# Altium PCB EMIA_HM1521_NETLIST.pcbdoc (part 1 of 2)
Units mm, origin at the board's own origin, x right, y up, seen from the top; angles counter-clockwise.
Board outline 118 x 84.09 mm, 2 copper layers (Top Layer, Bottom Layer), stack 0.972 mm thick; 201 components, 147 nets, 642 pads, 379 vias.
Unrouted connection lines stored in the file: 1.
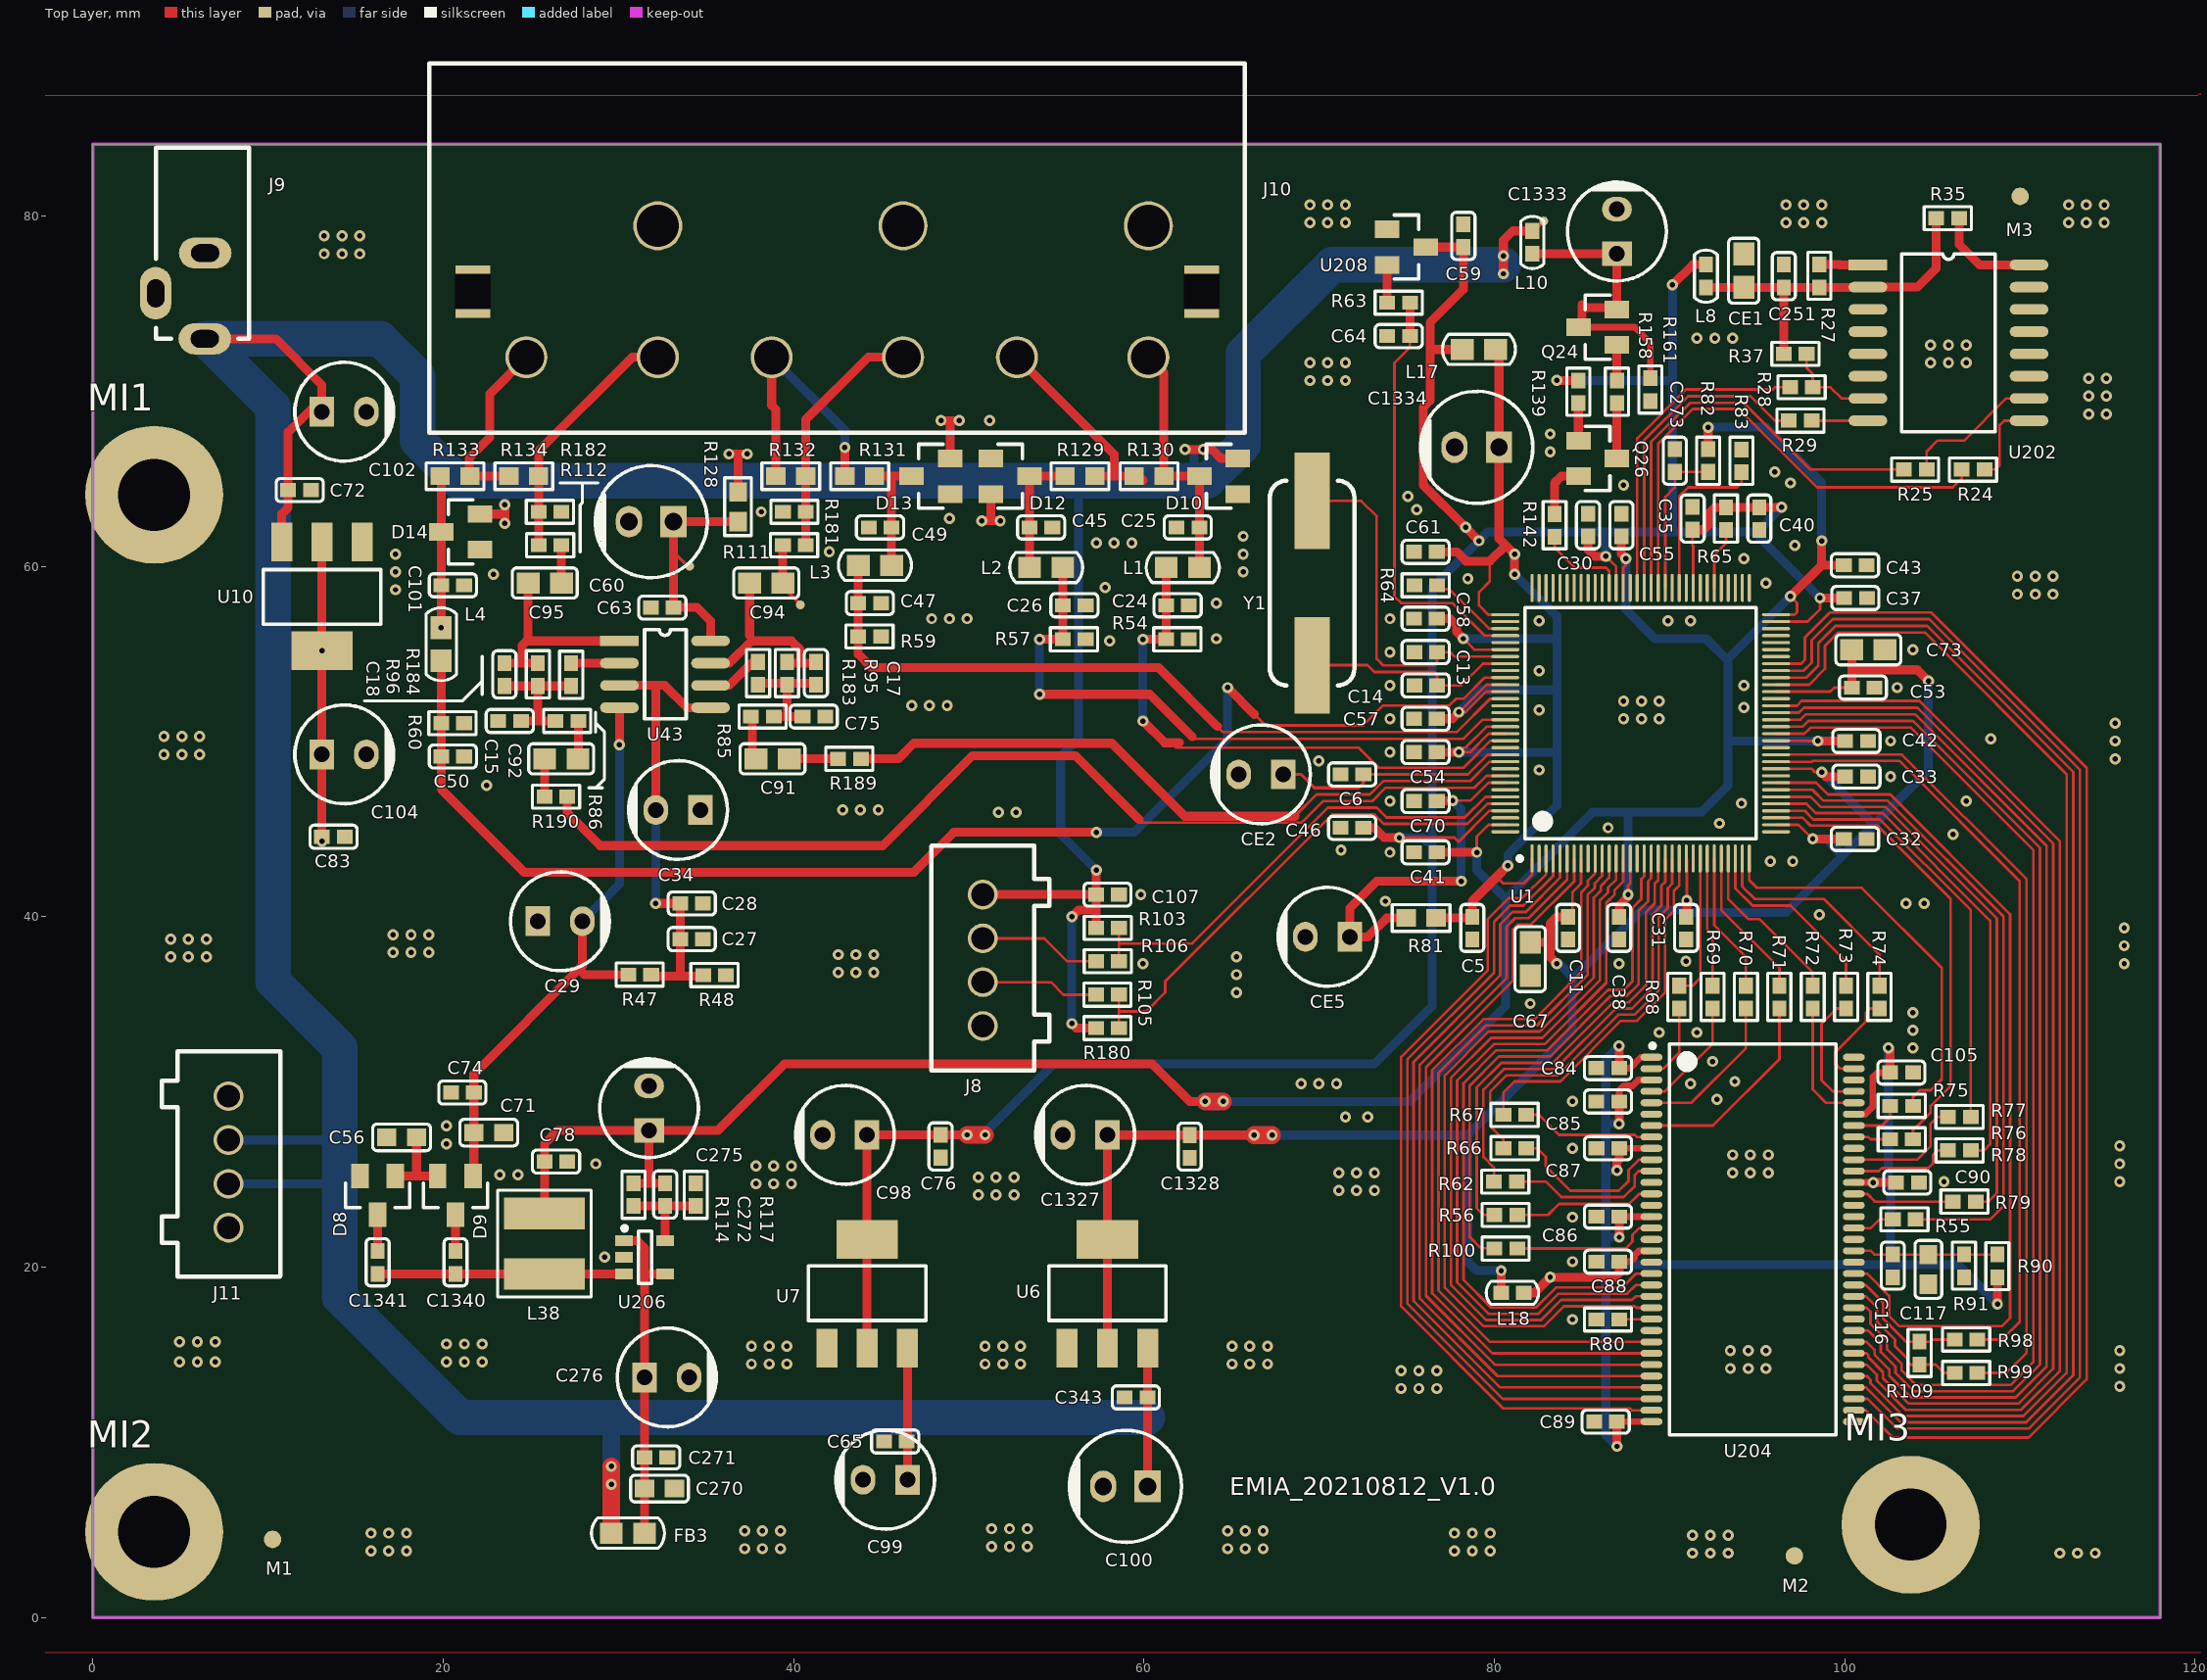
[diagram p0: Top Layer view]
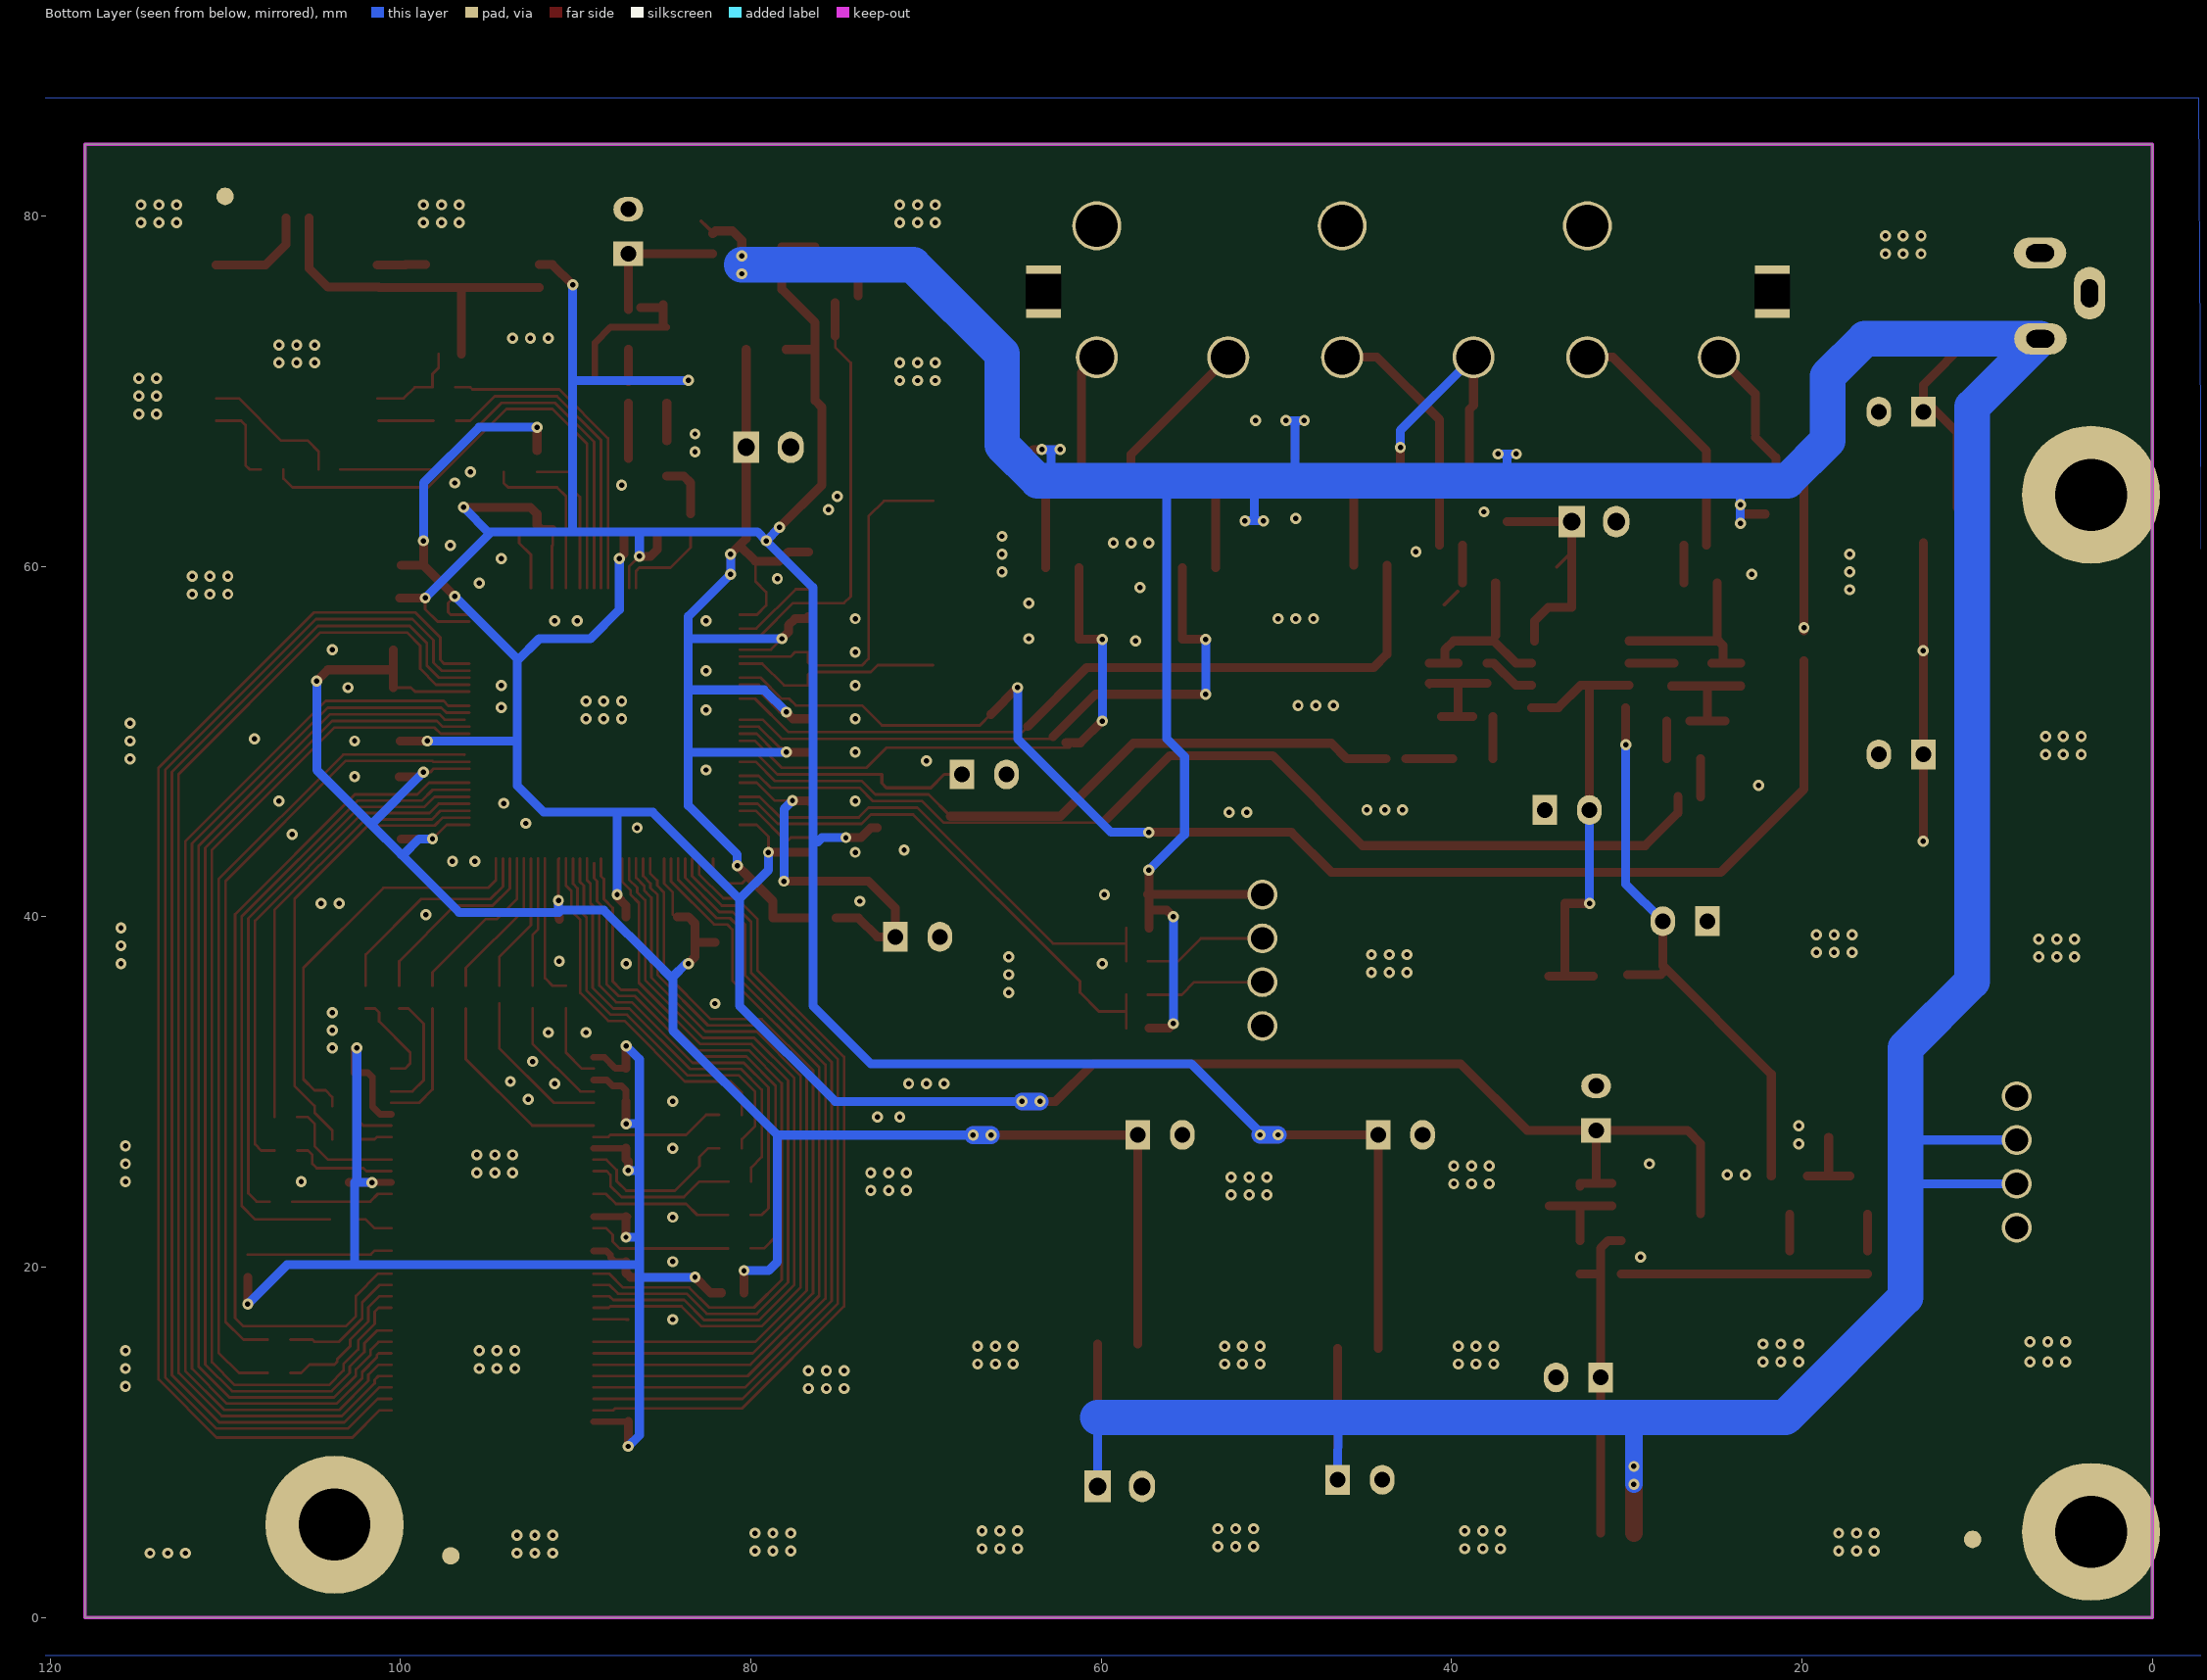
[diagram p1: Bottom Layer view, seen from below]

## Layer stack, top to bottom
Top Solder: solder mask 0.0102, Solder Resist, Dk 3.5
Top Layer: signal copper 0.0356
Dielectric 1: dielectric 0.9004, FR-4, Dk 4.8
Bottom Layer: signal copper 0.0356
Bottom Solder: solder mask 0.0102, Solder Resist, Dk 3.5

## Board outline
0,0 0,84.094 118,84.094 118,0

## Design rules (kind name [scope] priority, off if disabled: settings)
AssemblyTestPointUsage [All] p0 off: scope1count=1 scope1_0_kind=Board scope1_0_value=Board scope2count=1 scope2_0_kind=Board scope2_0_value=Board commentlength=0
AssemblyTestPointUsage [All] p1 off:
AssemblyTestpoint [All] p0 off: scope1count=1 scope1_0_kind=Board scope1_0_value=Board scope2count=1 scope2_0_kind=Board scope2_0_value=Board commentlength=0
AssemblyTestpoint [All] p1 off: testpointundercomponent=TRUE minsize=1.016 maxsize=2.54 preferedsize=1.524 minholesize=0 maxholesize=1.016 preferedholesize=0.813 testpointgrid=0.025 usegrid=TRUE gridtolerance=0 allowsidetop=TRUE allowsidebottom=TRUE
Clearance Clearance_1 [All] p0: scope1count=1 scope1_0_kind=Board scope1_0_value=Board scope2count=1 scope2_0_kind=Board scope2_0_value=Board commentlength=0 gap=0.254
Clearance [All] p0 off: scope1count=1 scope1_0_kind=Board scope1_0_value=Board scope2count=1 scope2_0_kind=Board scope2_0_value=Board commentlength=48 gap=0.203 // Protel DXP Scope 1 Expression Was: InPolygon
Clearance Clearance_1 [All] p1: gap=0.254 ignorepadtopadclearanceinfootprint=FALSE except(0: Arc-Hole Track-Hole SMDPad-Hole THPad-Hole Via-Hole Fill-Hole Poly-Hole Region-Hole Text-Hole; 0.203: Arc-Arc Arc-Track Arc-SMDPad Arc-Via Arc-Fill Arc-Poly Arc-Region Track-Track Track-SMDPad Track-Via Track-Fill Track-Poly Track-Region SMDPad-SMDPad SMDPad-Fill SMDPad-Poly SMDPad-Region)
Clearance [InPolygon] p2 off: gap=0.203 ignorepadtopadclearanceinfootprint=FALSE
ComponentClearance [All] p0 off: scope1count=1 scope1_0_kind=Board scope1_0_value=Board scope2count=1 scope2_0_kind=Board scope2_0_value=Board commentlength=0 gap=0.254 collisioncheckmode=3
ComponentClearance [All] p1 off: gap=0.254 collisioncheckmode=3 verticalgap=0.254 showdistances=FALSE
DiffPairsRouting [All] p0 off: scope1count=1 scope1_0_kind=Board scope1_0_value=Board scope2count=1 scope2_0_kind=Board scope2_0_value=Board commentlength=0
DiffPairsRouting [All] p1 off: maxlimit=0.381 minlimit=0.025 mostfreqgap=0.025 toplayer_minwidth=0.025 toplayer_maxwidth=0.381 toplayer_prefwidth=0.025 bottomlayer_minwidth=0.025 bottomlayer_maxwidth=0.381 bottomlayer_prefwidth=0.025 maxuncoupledlength=12.7
FabricationTestPointUsage [All] p0 off: scope1count=1 scope1_0_kind=Board scope1_0_value=Board scope2count=1 scope2_0_kind=Board scope2_0_value=Board commentlength=0 valid=0 allowmultiple=FALSE
FabricationTestPointUsage [All] p1 off: valid=0 allowmultiple=FALSE
FabricationTestpoint [All] p0 off: scope1count=1 scope1_0_kind=Board scope1_0_value=Board scope2count=1 scope2_0_kind=Board scope2_0_value=Board commentlength=0 side=3 testpointundercomponent=TRUE minsize=1.016 maxsize=2.54 preferedsize=1.524 minholesize=0 maxholesize=1.016 preferedholesize=0.813 testpointgrid=0.025
FabricationTestpoint [All] p1 off: side=3 testpointundercomponent=TRUE minsize=1.016 maxsize=2.54 preferedsize=1.524 minholesize=0 maxholesize=1.016 preferedholesize=0.813 testpointgrid=0.025 allowsidetop=TRUE allowsidebottom=TRUE usegrid=TRUE gridtolerance=0
FanoutControl Fanout_BGA [All] p0 off: scope1count=1 scope1_0_kind=Board scope1_0_value=Board scope2count=1 scope2_0_kind=Board scope2_0_value=Board commentlength=69 // Protel DXP Scope 1 Expression Was: IsBGA   Fanout_BGA (Default Rule)
FanoutControl Fanout_LCC [All] p0 off: scope1count=1 scope1_0_kind=Board scope1_0_value=Board scope2count=1 scope2_0_kind=Board scope2_0_value=Board commentlength=69 // Protel DXP Scope 1 Expression Was: IsLCC   Fanout_LCC (Default Rule)
FanoutControl Fanout_SOIC [All] p0 off: scope1count=1 scope1_0_kind=Board scope1_0_value=Board scope2count=1 scope2_0_kind=Board scope2_0_value=Board commentlength=71 // Protel DXP Scope 1 Expression Was: IsSOIC   Fanout_SOIC (Default Rule)
FanoutControl Fanout_Small [All] p0 off: scope1count=1 scope1_0_kind=Board scope1_0_value=Board scope2count=1 scope2_0_kind=Board scope2_0_value=Board commentlength=84 // Protel DXP Scope 1 Expression Was: (CompPinCount < 5)   Fanout_Small (Default Rule)
FanoutControl Fanout_Default [All] p0 off: scope1count=1 scope1_0_kind=Board scope1_0_value=Board scope2count=1 scope2_0_kind=Board scope2_0_value=Board commentlength=30 // Fanout_Default (Default Rule)
FanoutControl Fanout_BGA [IsBGA] p1 off: bgadir=Out bgaviamode=Centered fanoutstyle=Auto fanoutdirection=Alternating viagrid=0.025 // Fanout_BGA (Default Rule)
FanoutControl Fanout_LCC [IsLCC] p2 off: bgadir=Out bgaviamode=Centered fanoutstyle=Auto fanoutdirection=Alternating viagrid=0.025 // Fanout_LCC (Default Rule)
FanoutControl Fanout_SOIC [IsSOIC] p3 off: bgadir=Out bgaviamode=Centered fanoutstyle=Auto fanoutdirection=Alternating viagrid=0.025 // Fanout_SOIC (Default Rule)
FanoutControl Fanout_Small [(CompPinCount < 5)] p4 off: bgadir=Out bgaviamode=Centered fanoutstyle=Auto fanoutdirection=OutThenIn viagrid=0.025 // Fanout_Small (Default Rule)
FanoutControl Fanout_Default [All] p5 off: bgadir=Out bgaviamode=Centered fanoutstyle=Auto fanoutdirection=Alternating viagrid=0.025 // Fanout_Default (Default Rule)
Height [All] p0 off: scope1count=1 scope1_0_kind=Board scope1_0_value=Board scope2count=1 scope2_0_kind=Board scope2_0_value=Board commentlength=0
Height [All] p1 off: minheight=0 maxheight=25.4 prefheight=12.7
HoleSize [All] p0 off: scope1count=1 scope1_0_kind=Board scope1_0_value=Board scope2count=1 scope2_0_kind=Board scope2_0_value=Board commentlength=0 absolutevalues=TRUE maxlimit=5.08 minlimit=0.254 maxpercent=80.000 minpercent=20.000
HoleSize [All] p1 off: absolutevalues=TRUE maxlimit=5.08 minlimit=0.254 maxpercent=80.000 minpercent=20.000
HoleToHoleClearance [All] p0 off: scope1count=1 scope1_0_kind=Board scope1_0_value=Board scope2count=1 scope2_0_kind=Board scope2_0_value=Board commentlength=0
HoleToHoleClearance [All] p1 off: gap=0.254 allowstackedmicrovias=TRUE
LayerPairs [All] p0 off: scope1count=1 scope1_0_kind=Board scope1_0_value=Board scope2count=1 scope2_0_kind=Board scope2_0_value=Board commentlength=0 enforce=TRUE
LayerPairs [All] p1 off: enforce=TRUE
MinimumSolderMaskSliver [All] p0 off: scope1count=1 scope1_0_kind=Board scope1_0_value=Board scope2count=1 scope2_0_kind=Board scope2_0_value=Board commentlength=0
MinimumSolderMaskSliver [All] p1 off: minsoldermaskwidth=0.013
NetAntennae [All] p0 off: scope1count=1 scope1_0_kind=Board scope1_0_value=Board scope2count=1 scope2_0_kind=Board scope2_0_value=Board commentlength=0
NetAntennae [All] p1 off: netantennaetolerance=0
PasteMaskExpansion [All] p0 off: scope1count=1 scope1_0_kind=Board scope1_0_value=Board scope2count=1 scope2_0_kind=Board scope2_0_value=Board commentlength=0 expansion=0
PasteMaskExpansion [All] p1 off: expansion=0
PlaneClearance [All] p0 off: scope1count=1 scope1_0_kind=Board scope1_0_value=Board scope2count=1 scope2_0_kind=Board scope2_0_value=Board commentlength=0 clearance=0.508
PlaneClearance [All] p1 off: clearance=0.508
PlaneConnect [All] p0 off: scope1count=1 scope1_0_kind=Board scope1_0_value=Board scope2count=1 scope2_0_kind=Board scope2_0_value=Board commentlength=0 planeconnectstyle=Direct reliefexpansion=0.508 reliefentries=4 reliefconductorwidth=0.254 reliefairgap=0.254
PlaneConnect [All] p1 off: planeconnectstyle=Direct reliefexpansion=0.508 reliefentries=4 reliefconductorwidth=0.254 reliefairgap=0.254
PolygonConnect [All] p0 off: scope1count=1 scope1_0_kind=Board scope1_0_value=Board scope2count=1 scope2_0_kind=Board scope2_0_value=Board commentlength=0 connectstyle=Direct reliefconductorwidth=0.254 reliefentries=4 polygonreliefangle="90 Angle"
PolygonConnect [All] p1 off: connectstyle=Direct reliefconductorwidth=0.254 reliefentries=4 polygonreliefangle="90 Angle" airgapwidth=0.254
RoutingCorners [All] p0 off: scope1count=1 scope1_0_kind=Board scope1_0_value=Board scope2count=1 scope2_0_kind=Board scope2_0_value=Board commentlength=0 cornerstyle=45-Degree minsetback=2.54 maxsetback=2.54
RoutingCorners [All] p1 off: cornerstyle=45-Degree minsetback=2.54 maxsetback=2.54
RoutingLayers [All] p0 off: scope1count=1 scope1_0_kind=Board scope1_0_value=Board scope2count=1 scope2_0_kind=Board scope2_0_value=Board commentlength=0 top layer=Automatic bottom layer=Automatic
RoutingLayers [All] p1 off: top layer_v5=TRUE bottom layer_v5=TRUE
RoutingPriority [All] p0 off: scope1count=1 scope1_0_kind=Board scope1_0_value=Board scope2count=1 scope2_0_kind=Board scope2_0_value=Board commentlength=0
RoutingPriority [All] p1 off: routingpriority=0
RoutingTopology [All] p0 off: scope1count=1 scope1_0_kind=Board scope1_0_value=Board scope2count=1 scope2_0_kind=Board scope2_0_value=Board commentlength=0 topology=Shortest
RoutingTopology [All] p1 off: topology=Shortest
RoutingVias [All] p0 off: scope1count=1 scope1_0_kind=Board scope1_0_value=Board scope2count=1 scope2_0_kind=Board scope2_0_value=Board commentlength=0 holewidth=0.305 width=0.635 viastyle="Through Hole" minholewidth=0.305 minwidth=0.635 maxholewidth=0.305 maxwidth=0.635
RoutingVias [All] p1 off: holewidth=0.305 width=0.635 viastyle="Through Hole" minholewidth=0.305 minwidth=0.635 maxholewidth=0.305 maxwidth=0.635
SMDNeckDown [All] p0 off: scope1count=1 scope1_0_kind=Board scope1_0_value=Board scope2count=1 scope2_0_kind=Board scope2_0_value=Board commentlength=0 percent=100.000
SMDNeckDown [All] p1 off: percent=100.000
ShortCircuit [All] p0 off: scope1count=1 scope1_0_kind=Board scope1_0_value=Board scope2count=1 scope2_0_kind=Board scope2_0_value=Board commentlength=0 allowed=FALSE
ShortCircuit [All] p1 off: allowed=FALSE
SilkToBoardRegionClearance [All] p0 off: scope1count=1 scope1_0_kind=Board scope1_0_value=Board scope2count=1 scope2_0_kind=Board scope2_0_value=Board commentlength=0
SilkToBoardRegionClearance [All] p1 off:
SilkToSilkClearance [All] p0 off: scope1count=1 scope1_0_kind=Board scope1_0_value=Board scope2count=1 scope2_0_kind=Board scope2_0_value=Board commentlength=0
SilkToSilkClearance [All] p1 off: silktosilkclearance=0.152
SilkToSolderMaskClearance [All] p0 off: scope1count=1 scope1_0_kind=Board scope1_0_value=Board scope2count=1 scope2_0_kind=Board scope2_0_value=Board commentlength=44 // Protel DXP Scope 1 Expression Was: IsPad
SilkToSolderMaskClearance [IsPad] p1 off: minsilkscreentomaskgap=0.127 clearancetoexposedcopper=TRUE
SolderMaskExpansion [All] p0 off: scope1count=1 scope1_0_kind=Board scope1_0_value=Board scope2count=1 scope2_0_kind=Board scope2_0_value=Board commentlength=0 expansion=0.102
SolderMaskExpansion [All] p1 off: expansion=0.102
UnRoutedNet [All] p0 off: scope1count=1 scope1_0_kind=Board scope1_0_value=Board scope2count=1 scope2_0_kind=Board scope2_0_value=Board commentlength=0
UnRoutedNet [All] p1 off:
UnpouredPolygon [All] p0 off: scope1count=1 scope1_0_kind=Board scope1_0_value=Board scope2count=1 scope2_0_kind=Board scope2_0_value=Board commentlength=0
UnpouredPolygon [All] p1 off:
Width Width_pwr [All] p0 off: scope1count=1 scope1_0_kind=Board scope1_0_value=Board scope2count=1 scope2_0_kind=Board scope2_0_value=Board commentlength=256 maxlimit=2.54 minlimit=0.025 preferedwidth=0.381 // Protel DXP Scope 1 Expression Was: InNet('5V') OR InNet('5VA') OR InNet('A3V3') OR InNet('A3V3_AUDIO') OR InNet('D1V2') OR InNet('D2V5')  OR InNet('D3V3') OR InNet('D3V3_T') OR InNet('PWR_DRAM') OR InNet('SC_VCCEN') OR InNet('SFVCC') OR InNet('SC_VCC')
Width Width_def [All] p0 off: scope1count=1 scope1_0_kind=Board scope1_0_value=Board scope2count=1 scope2_0_kind=Board scope2_0_value=Board commentlength=0 maxlimit=0.508 minlimit=0.025 preferedwidth=0.152
Width Width_pwr [InNet('5V') OR InNet('5VA') OR InNet('A3V3') OR InNet('A3V3_AUDIO') OR InNet('D1V2') OR InNet('D2V5')  OR InNet('D3V3') OR InNet('D3V3_T') OR InNet('PWR_DRAM') OR InNet('SC_VCCEN') OR InNet('SFVCC') OR InNet('SC_VCC')] p1 off: maxlimit=2.54 minlimit=0.025 preferedwidth=0.381 minimp=50.000000 maximp=50.000000 favimp=50.000000
Width Width_def [All] p2 off: maxlimit=0.508 minlimit=0.025 preferedwidth=0.152 minimp=50.000000 maximp=50.000000 favimp=50.000000

## Classes and differential pairs
net class "Signle Nets": 1P2AO /SYS_RST A_L A_R AUL AUR CVBS DDR_A0 DDR_A1 DDR_A2 DDR_A3 DDR_A4 DDR_A5 DDR_A6 DDR_A7 DDR_A8 DDR_A9 DDR_A10 DDR_A11 DDR_A12 DDR_BA0 DDR_BA1 DDR_CAS DDR_CKE DDR_CKN DDR_CKP DDR_D0 DDR_D1 DDR_D2 DDR_D3 DDR_D4 DDR_D5 DDR_D6 DDR_D7 DDR_D8 DDR_D9 DDR_D10 DDR_D11 DDR_D12 DDR_D13 DDR_D14 DDR_D15 DDR_DM0 DDR_DM1 DDR_DQS0 DDR_DQS1 DDR_RAS DDR_WE DR_CKN DR_CKP DR_D0 DR_D1 DR_D2 DR_D3 DR_D4 DR_D5 DR_D6 DR_D7 DR_D8 DR_D9 DR_D10 DR_D11 DR_D12 DR_D13 DR_D14 DR_D15 DR_DQS0 DR_DQS1 GPIO14 NetC6_2 NetC13_1 NetC14_1 NetC15_2 NetC17_1 NetC17_2 NetC18_2 NetC56_1 NetC91_1 NetC91_2 NetC92_1 NetC92_2 NetC94_2 NetC95_2 NetC116_2 NetC270_1 NetC272_1 NetC1333_1 NetC1340_1 NetC1340_2 NetC1341_2 NetJ8_2 NetJ8_3 NetJ10_1 NetJ10_4 NetJ10_7 NetQ24_1 NetQ26_1 NetQ26_2 NetQ26_3 NetR63_1 NetR64_1 NetR80_2 NetR83_1 NetR183_2 NetR184_1 Pb Pr RXD S_/CS S_CLK S_SI S_SO SC_CLK SC_DETECT SC_IO SC_RST SC_VCC SCL SDA SFCLK SFCS SFHOLD SFSI SFSO SFVCC SFWP SPI1_CLK SPI1_IO0 TXD V_DAC0 V_DAC1 V_DAC2 V_DAC3 Vref Y

## Components (designator, comment, footprint, x,y, rotation, side; value= is the part's Value field where it differs from the comment)
C5 "Cap" 0402C 78.74,39.37 r90 top
C6 "Cap" 0402C 71.882,48.133 r0 top
C11 "Cap" 0402C 84.201,39.37 r90 top
C13 "Cap" 0402C 76.073,55.118 r180 top
C14 "Cap" 0402C 76.073,53.213 r180 top
C15 "Cap" 0402C 23.8,51.181 r0 top
C17 "Cap" 0402C 41.275,53.912 r90 top
C18 "Cap" 0402C 23.495,53.843 r90 top
C24 "Cap" 0402C 61.922,57.785 r0 top
C25 "Cap" 0402C 62.502,62.23 r180 top
C26 "Cap" 0402C 56.027,57.785 r0 top
C27 "Cap" 0402C 34.188,38.735 r0 top
C28 "Cap" 0402C 34.188,40.767 r0 top
C29 "Cap" SD1C107M05011BB 26.67,39.751 r0 top
C30 "Cap" 0402C 85.344,62.357 r270 top
C31 "Cap" 0402C 90.951,39.37 r90 top
C32 "Cap" 0402C 100.584,44.45 r180 top
C33 "Cap" 0402C 100.666,48.006 r180 top
C34 "Cap" SD1C107M05011BB 33.401,46.101 r180 top
C35 "Cap" 0402C 91.313,62.738 r270 top
C37 "Cap" 0402C 100.605,58.202 r180 top
C38 "Cap" 0402C 87.122,39.37 r90 top
C40 "Cap" 0402C 95.123,62.738 r90 top
C41 "Cap" 0402C 76.073,43.688 r0 top
C42 "Cap" 0402C 100.666,50.038 r180 top
C43 "Cap" 0402C 100.584,60.071 r180 top
C45 "Cap" 0402C 54.127,62.23 r0 top
C46 "Cap" 0402C 71.882,45.085 r0 top
C47 "Cap" 0402C 44.353,57.912 r0 top
C49 "Cap" 0402C 44.933,62.23 r180 top
C50 "Cap" 0402C 20.55,49.154 r0 top
C53 "Cap" 0402C 101.036,53.086 r180 top
C54 "Cap" 0402C 76.073,49.403 r0 top
C55 "Cap" 0402C 87.249,62.357 r270 top
C56 "Cap" 0603C 17.628,27.416 r180 top
C57 "Cap" 0402C 76.073,51.308 r0 top
C58 "Cap" 0402C 76.073,57.023 r0 top
C59 "Cap" 0402C 78.232,78.872 r270 top
C60 "Cap" SD1C227M6L011BB 31.877,62.561 r180 top
C61 "Cap" 0402C 76.073,60.833 r0 top
C63 "Cap" 0402C 32.51,57.658 r0 top
C64 "Cap" 0402C 74.542,73.152 r0 top
C65 "Cap" 0402C 45.796,10.058 r180 top
C67 "Cap" 0805C 82.042,37.592 r90 top
C70 "Cap" 0402C 76.073,46.609 r0 top
C71 "Cap" 0603C 22.601,27.686 r0 top
C72 "Cap" 0402C 11.811,64.364 r0 top
C73 "Cap" 0805C 101.346,55.245 r180 top
C74 "Cap" 0402C 21.091,29.972 r180 top
C75 "Cap" 0402C 41.148,51.435 r180 top
C76 "Cap" 0402C 48.387,26.899 r270 top
C78 "Cap" 0402C 26.441,26.035 r0 top
C83 "Cap" 0402C 13.741,44.577 r0 top
C84 "Cap" 0402C 86.482,31.369 r0 top
C85 "Cap" 0402C 86.482,29.464 r0 top
C86 "Cap" 0402C 86.487,22.89 r0 top
C87 "Cap" 0402C 86.487,26.797 r0 top
C88 "Cap" 0402C 86.487,20.32 r0 top
C89 "Cap" 0402C 86.355,11.19 r0 top
C90 "Cap" 0402C 103.569,24.84 r180 top
C91 "Cap" 0805C 38.799,49.022 r180 top
C92 "Cap" 0805C 26.736,49.022 r0 top
C94 "Cap" 0805C 38.439,59.055 r0 top
C95 "Cap" 0805C 25.799,59.055 r0 top
C98 "Cap" SD1C107M05011BB 42.926,27.559 r180 top
C99 "Cap" SD1C107M05011BB 45.226,7.874 r180 top
C100 "Cap" SD1C227M6L011BB 58.942,7.495 r180 top
C101 "Cap" 0402C 20.55,58.928 r0 top
C102 "Cap" SD1C107M05011BB 14.351,68.834 r0 top
C104 "Cap" SD1C107M05011BB 14.351,49.276 r0 top
C105 "Cap" 0402C 103.23,31.115 r180 top
C107 "Cap" 0402C 57.912,41.275 r180 top
C116 "Cap" 0402C 102.743,20.091 r90 top
C117 "Cap" 0603C 104.775,19.881 r90 top
C251 "Cap" 0402C 96.52,76.573 r270 top
C270 "Cap" 0603C 32.346,7.366 r0 top
C271 "Cap" 0402C 32.156,9.144 r0 top
C272 "Cap" 0402C 32.671,24.155 r90 top
C273 "Cap" 0402C 90.297,66.04 r270 top
C275 "Cap" SD1C107M05011BB 31.75,29.083 r90 top
C276 "Cap" SD1C107M05011BB 32.766,13.716 r0 top
C343 "Cap" 0402C 59.538,12.573 r180 top
C1327 "Cap" SD1C107M05011BB 56.642,27.559 r180 top
C1328 "Cap" 0402C 62.611,26.885 r270 top
C1333 "Cap" SD1C107M05011BB 86.995,79.121 r90 top
C1334 "Cap" SD1C227M6L011BB 78.994,66.802 r180 top
C1340 "Cap" 0402C 20.701,20.284 r90 top
C1341 "Cap" 0402C 16.256,20.284 r90 top
CE1 "Cap" 0805C 94.234,76.883 r90 top
CE2 "Cap" SD1C107M05011BB 66.675,48.133 r180 top
CE5 "Cap" SD1C107M05011BB 70.485,38.862 r180 top
D8 "D_Diode" BAT54S(SOT23) 16.256,24.114 r270 top
D9 "D_Diode" BAT54S(SOT23) 20.701,24.114 r270 top
D10 "D_Diode" BAT54S(SOT23) 64.262,65.151 r180 top
D12 "D_Diode" BAT54S(SOT23) 52.367,65.151 r0 top
D13 "D_Diode" BAT54S(SOT23) 47.836,65.151 r180 top
D14 "D_Diode" BAT54S(SOT23) 20.99,61.976 r180 top
FB3 "Inductor" 0805L 30.546,4.826 r0 top
J8 "4_HEADER" TJC3-4P 50.8,33.775 r90 top
J9 "POWER_SOCKET" DC插座 6.39,72.994 r270 top
J10 "RCA6" AVLP-23-6A-0A102 24.75,79.444 r180 top
J11 "4_HEADER" TJC3-4P 7.747,29.765 r270 top
L1 "Inductor" 0805L 62.212,59.944 r0 top
L2 "Inductor" 0805L 54.417,59.944 r180 top
L3 "Inductor" 0805L 44.643,60.071 r0 top
L4 "Inductor" 0805L 19.89,55.565 r90 top
L8 "Inductor" 0402L 92.075,76.573 r270 top
L10 "Inductor" 0402L 82.169,78.491 r270 top
L17 "Inductor" 0805L 79.121,72.39 r0 top
L18 "Inductor" 0402L 81.026,18.542 r180 top
L38 "Inductor" PIO43-2R2MB 25.781,21.349 r90 top
M1 "1-MARKFA" MARK 10.262,4.47 r0 top
M2 "1-MARKFA" MARK 97.13,3.531 r0 top
M3 "1-MARKFA" MARK 110.007,81.128 r0 top
MI1 "" Screw-R7.8 3.556,63.856 r0 top
MI2 "" Screw-R7.8 3.556,4.666 r0 top
MI3 "" Screw-R7.8 103.816,5.076 r0 top
Q24 "PNP(123-BEC)" 2SB1197K-SOT23 85.895,73.66 r180 top
Q26 "NPN(123-BEC)" PMBT3904-SOT23 85.895,66.167 r0 top
R24 "Res1" 0402R 107.32,65.532 r180 top
R25 "Res1" 0402R 104.013,65.532 r180 top
R27 "Res1" 0402R 98.552,76.594 r90 top
R28 "Res1" 0402R 97.536,70.231 r0 top
R29 "Res1" 0402R 97.472,68.326 r0 top
R35 "Res1" 0402R 105.88,79.883 r0 top
R37 "Res1" 0402R 97.18,72.136 r0 top
R47 "Res1" 0402R 31.212,36.703 r180 top
R48 "Res1" 0402R 35.484,36.678 r180 top
R54 "Res1" 0402R 61.902,55.847 r180 top
R55 "Res1" 0402R 103.403,22.733 r0 top
R56 "Res1" 0402R 80.645,22.987 r180 top
R57 "Res1" 0402R 56.007,55.847 r180 top
R59 "Res1" 0402R 44.333,56.007 r180 top
R60 "Res1" 0402R 20.53,51.059 r180 top
R62 "Res1" 0402R 80.62,24.892 r180 top
R63 "Res1" 0402R 74.542,75.057 r0 top
R64 "Res1" 0402R 76.073,58.928 r180 top
R65 "Res1" 0402R 93.218,62.738 r90 top
R66 "Res1" 0402R 81.153,26.797 r180 top
R67 "Res1" 0402R 81.153,28.702 r180 top
R68 "Res1" 0402R 90.551,35.433 r90 top
R69 "Res1" 0402R 92.456,35.433 r90 top
R70 "Res1" 0402R 94.361,35.433 r90 top
R71 "Res1" 0402R 96.266,35.433 r90 top
R72 "Res1" 0402R 98.171,35.433 r90 top
R73 "Res1" 0402R 100.076,35.433 r90 top
R74 "Res1" 0402R 101.981,35.433 r90 top
R75 "Res1" 0402R 103.251,29.21 r0 top
R76 "Res1" 0402R 103.246,27.305 r0 top
R77 "Res1" 0402R 106.553,28.575 r0 top
R78 "Res1" 0402R 106.553,26.67 r0 top
R79 "Res1" 0402R 106.832,23.749 r0 top
R80 "Res1" 0402R 86.487,17.018 r0 top
R81 "Res1" 0603R 75.819,39.941 r180 top
R82 "Res1" 0402R 92.202,66.04 r270 top
R83 "Res1" 0402R 94.107,66.04 r90 top
R85 "Res1" 0402R 38.227,51.435 r0 top
R86 "Res1" 0402R 27.076,51.181 r0 top
R90 "Res1" 0402R 108.712,20.071 r270 top
R91 "Res1" 0402R 106.807,20.091 r90 top
R95 "Res1" 0402R 39.624,53.911 r90 top
R96 "Res1" 0402R 25.402,53.843 r90 top
R98 "Res1" 0402R 106.934,15.875 r0 top
R99 "Res1" 0402R 106.934,13.97 r0 top
R100 "Res1" 0402R 80.645,21.069 r180 top
R103 "Res1" 0402R 57.933,39.37 r0 top
R105 "Res1" 0402R 57.912,35.56 r180 top
R106 "Res1" 0402R 57.933,37.465 r0 top
R109 "Res1" 0402R 104.267,15.113 r90 top
R111 "Res1" 0402R 40.029,61.214 r180 top
R112 "Res1" 0402R 26.109,61.214 r0 top
R114 "Res1" 0402R 30.861,24.135 r270 top
R117 "Res1" 0402R 34.417,24.135 r270 top
R128 "Res1" 0603R 36.83,63.411 r270 top
R129 "Res1" 0603R 56.349,65.151 r180 top
R130 "Res1" 0603R 60.286,65.151 r0 top
R131 "Res1" 0603R 43.776,65.151 r0 top
R132 "Res1" 0603R 39.839,65.151 r0 top
R133 "Res1" 0603R 20.676,65.151 r180 top
R134 "Res1" 0603R 24.599,65.151 r0 top
R139 "Res1" 0402R 84.795,69.977 r90 top
R142 "Res1" 0402R 83.439,62.357 r90 top
R158 "Res1" 0402R 86.995,69.977 r90 top
R161 "Res1" 0402R 88.9,70.104 r90 top
R180 "Res1" 0402R 57.912,33.655 r180 top
R181 "Res1" 0402R 40.049,63.119 r0 top
R182 "Res1" 0402R 26.089,63.119 r180 top
R183 "Res1" 0402R 37.973,53.911 r90 top
R184 "Res1" 0402R 27.305,53.823 r270 top
R189 "Res1" 0402R 43.18,49.022 r180 top
R190 "Res1" 0402R 26.446,46.863 r0 top
U1 "HM1521-M" HM1521-M 75.651,51.33 r90 top
U6 "REG1117-2v5" AZ1117H-2.5TRE1-SOT223 57.912,18.49 r90 top
U7 "REG1117-3V3" AZ1117H-3.3TRE1-SOT223 44.196,18.49 r90 top
U10 "REG1117-3V3" AZ1117H-3.3TRE1-SOT223 13.081,58.293 r270 top
U43 "NE4558D" SOP8 32.658,53.848 r0 top
U202 "S25FL064" SO16 105.918,72.771 r0 top
U204 "TSSOP66" TSOP66 94.742,21.59 r0 top
U206 "LSP3100" LSP3100C 31.496,20.574 r0 top
U208 "MAX809" SGM809SXN3(SOT23) 74.982,78.232 r0 top
Y1 "XTAL" 49UC 69.596,59.055 r90 top

## Footprints (in the part's own frame and the unit in brackets; to place one, negate y for a bottom-side part, rotate by r counter-clockwise, add the part's x,y. Pads: shape width x height; smd on the part's side, far side on the other; paste and mask are expansions set on the pad)
2SB1197K-SOT23 [mm]
  rect 1.4x1 smd mask+0: 1(-1.1,1.016) 2(-1.1,-1.016) 3(1.1,0)
  silkscreen extent -0.7,-1.83 0.7,1.83
49UC [mm]
  rect 5.5x2 smd: 1(-4.69,0) 2(4.69,0)
  silkscreen extent -5.84,-2.42 5.84,2.42
0402C [mm]
  rect 0.9x0.8 smd: 1(-0.66,0) 2(0.64,0)
  silkscreen extent -1.35,-0.66 1.35,0.66
0402L [mm]
  rect 0.9x0.8 smd: 1(-0.66,0) 2(0.64,0)
  silkscreen extent -1.49,-0.66 1.49,0.66
0402R [mm]
  rect 0.9x0.8 smd: 1(-0.66,0) 2(0.64,0)
  silkscreen extent -1.35,-0.66 1.35,0.66
0603C [mm]
  rect 1.1x1 smd: 1(-0.85,0) 2(0.85,0)
  silkscreen extent -1.65,-0.76 1.65,0.76
0603R [mm]
  rect 1.1x1 smd: 1(-0.85,0) 2(0.85,0)
  silkscreen extent -1.65,-0.76 1.65,0.76
0805C [mm]
  rect 1.3x1.2 smd: 1(-0.95,0) 2(0.95,0)
  silkscreen extent -1.85,-0.86 1.85,0.86
0805L [mm]
  rect 1.3x1.2 smd: 1(-0.95,0) 2(0.95,0)
  silkscreen extent -2.08,-0.86 2.08,0.86
AVLP-23-6A-0A102 [mm]
  round 2.4 hole 2: 1(0,7.5) 2(-7.5,7.5) 4(-14,7.5) 5(-21.5,7.5) 7(-28,7.5) 8(-35.5,7.5)
  round 2.8 hole 2.4: 3(-7.5,0) 6(-21.5,0) 9(-35.5,0)
  rect 2x3 hole 2 square: Hole(-38.55,3.75) Hole(3.05,3.75)
  silkscreen extent -41,-9.26 5.54,11.8
AZ1117H-2.5TRE1-SOT223 [mm]
  rect 2.2x1.2 smd: 1(-3.1,2.3) 2(-3.1,0) 3(-3.1,-2.3)
  rect 2.2x3.5 smd: 4(3.1,0)
  silkscreen extent -1.53,-3.35 1.6,3.35
AZ1117H-3.3TRE1-SOT223 [mm] "SOT223, 4-Leads, Body 6.50x7.00mm (avg), Pitch 2.30mm, IPC Medium Density"
  rect 2.2x1.2 smd: 1(-3.1,2.3) 2(-3.1,0) 3(-3.1,-2.3)
  rect 2.2x3.5 smd: 4(3.1,0)
  silkscreen extent -1.53,-3.35 1.6,3.35
BAT54S(SOT23) [mm]
  rect 1.4x1 smd mask+0: 1(-1.1,1.016) 2(-1.1,-1.016) 3(1.1,0)
  silkscreen extent -0.7,-1.83 0.7,1.83
DC插座 [mm]
  oval 1.778x3 hole 1 slot 1.6 at 90 deg: 1(0,0) 2(-4.9,0.025)
  oval 3x1.778 hole 1 slot 1.6 at 0 deg: 3(-2.6,-2.8)
  silkscreen extent -10.9,-2.79 0,2.54
HM1521-M [mm]
  oval 1.6x0.18 smd: 1(-8,-6.5) 2(-8,-6.9) 3(-8,-7.3) 4(-8,-7.7) 5(-8,-8.1) 6(-8,-8.5) 7(-8,-8.9) 8(-8,-9.3) 9(-8,-9.7) 10(-8,-10.1) 11(-8,-10.5) 12(-8,-10.9) 13(-8,-11.3) 14(-8,-11.7) 15(-8,-12.1) 16(-8,-12.5) 17(-8,-12.9) 18(-8,-13.3) 19(-8,-13.7) 20(-8,-14.1) 21(-8,-14.5) 22(-8,-14.9) 23(-8,-15.3) 24(-8,-15.7) 25(-8,-16.1) 26(-8,-16.5) 27(-8,-16.9) 28(-8,-17.3) 29(-8,-17.7) 30(-8,-18.1) 31(-8,-18.5) 32(-8,-18.9) 65(7.45,-18.9) 66(7.45,-18.5) 67(7.45,-18.1) 68(7.45,-17.7) 69(7.45,-17.3) 70(7.45,-16.9) 71(7.45,-16.5) 72(7.45,-16.1) 73(7.45,-15.7) 74(7.45,-15.3) 75(7.45,-14.9) 76(7.45,-14.5) 77(7.45,-14.1) 78(7.45,-13.7) 79(7.45,-13.3) 80(7.45,-12.9) 81(7.45,-12.5) 82(7.45,-12.1) 83(7.45,-11.7) 84(7.45,-11.3) 85(7.45,-10.9) 86(7.45,-10.5) 87(7.45,-10.1) 88(7.45,-9.7) 89(7.45,-9.3) 90(7.45,-8.9) 91(7.45,-8.5) 92(7.45,-8.1) 93(7.45,-7.7) 94(7.45,-7.3) 95(7.45,-6.9) 96(7.45,-6.5)
  oval 0.18x1.6 smd: 33(-6.475,-20.425) 34(-6.075,-20.425) 35(-5.675,-20.425) 36(-5.275,-20.425) 37(-4.875,-20.425) 38(-4.475,-20.425) 39(-4.075,-20.425) 40(-3.675,-20.425) 41(-3.275,-20.425) 42(-2.875,-20.425) 43(-2.475,-20.425) 44(-2.075,-20.425) 45(-1.675,-20.425) 46(-1.275,-20.425) 47(-0.875,-20.425) 48(-0.475,-20.425) 49(-0.075,-20.425) 50(0.325,-20.425) 51(0.725,-20.425) 52(1.125,-20.425) 53(1.525,-20.425) 54(1.925,-20.425) 55(2.325,-20.425) 56(2.725,-20.425) 57(3.125,-20.425) 58(3.525,-20.425) 59(3.925,-20.425) 60(4.325,-20.425) 61(4.725,-20.425) 62(5.125,-20.425) 63(5.525,-20.425) 64(5.925,-20.425) 97(5.925,-4.975) 98(5.525,-4.975) 99(5.125,-4.975) 100(4.725,-4.975) 101(4.325,-4.975) 102(3.925,-4.975) 103(3.525,-4.975) 104(3.125,-4.975) 105(2.725,-4.975) 106(2.325,-4.975) 107(1.925,-4.975) 108(1.525,-4.975) 109(1.125,-4.975) 110(0.725,-4.975) 111(0.325,-4.975) 112(-0.075,-4.975) 113(-0.475,-4.975) 114(-0.875,-4.975) 115(-1.275,-4.975) 116(-1.675,-4.975) 117(-2.075,-4.975) 118(-2.475,-4.975) 119(-2.875,-4.975) 120(-3.275,-4.975) 121(-3.675,-4.975) 122(-4.075,-4.975) 123(-4.475,-4.975) 124(-4.875,-4.975) 125(-5.275,-4.975) 126(-5.675,-4.975) 127(-6.075,-4.975) 128(-6.475,-4.975)
  silkscreen extent -8.12,-19.3 6.33,-5.68
LSP3100C [mm]
  rect 1x0.6 smd: 1(-1.175,0.95) 2(-1.175,0) 3(-1.175,-0.95) 4(1.175,-0.95) 5(1.175,0.95)
  silkscreen extent -1.27,-1.5 0.41,1.78
MARK [mm]
  round 1 all layers, no hole: 1(0,0)
PIO43-2R2MB [mm]
  rect 1.8x4.6 smd: 1(-1.725,0) 2(1.725,0)
  silkscreen extent -3.05,-2.67 3.05,2.67
PMBT3904-SOT23 [mm]
  rect 1.4x1 smd mask+0: 1(-1.1,1.016) 2(-1.1,-1.016) 3(1.1,0)
  silkscreen extent -0.7,-1.83 0.7,1.83
Screw-R7.8 [mm]
  round 7.882 hole 4.102 unplated: MI(-0.056,0.234)
SD1C107M05011BB [mm]
  rect 1.4x1.7 hole 0.9 mask+0: 1(-1.27,0)
  oval 1.4x1.7 hole 0.9 mask+0: 2(1.27,0)
  silkscreen extent -2.82,-2.82 2.82,2.82
SD1C227M6L011BB [mm]
  rect 1.5x1.8 hole 1 mask+0: 1(-1.27,0)
  oval 1.5x1.8 hole 1 mask+0: 2(1.27,0)
  silkscreen extent -3.2,-3.2 3.2,3.2
SGM809SXN3(SOT23) [mm]
  rect 1.4x1 smd mask+0: 1(-1.1,1.016) 2(-1.1,-1.016) 3(1.1,0)
  silkscreen extent -0.7,-1.83 0.7,1.83
SO16 [mm] "SOP, 16-Leads, Body 10.30x7.50mm, Pitch 1.27mm, IPC Medium Density"
  rect 2.2x0.6 smd: 1(-4.6,4.445)
  oval 2.2x0.6 smd: 2(-4.6,3.175) 3(-4.6,1.905) 4(-4.6,0.635) 5(-4.6,-0.635) 6(-4.6,-1.905) 7(-4.6,-3.175) 8(-4.6,-4.445) 9(4.6,-4.445) 10(4.6,-3.175) 11(4.6,-1.905) 12(4.6,-0.635) 13(4.6,0.635) 14(4.6,1.905) 15(4.6,3.175) 16(4.6,4.445)
  silkscreen extent -2.66,-5.08 2.67,5.08
SOP8 [mm]
  rect 2.2x0.6 smd: 1(-2.6,1.905)
  oval 2.2x0.6 smd: 2(-2.6,0.635) 3(-2.6,-0.635) 4(-2.6,-1.905) 5(2.6,-1.905) 6(2.6,-0.635) 7(2.6,0.635) 8(2.6,1.905)
  silkscreen extent -1.16,-2.54 1.21,2.54
TJC3-4P [mm]
  round 1.7 hole 1.3: 1(7.5,0) 2(5,0) 3(2.5,0) 4(0,0)
  silkscreen extent -2.55,-3.81 10.3,2.95
TSOP66 [mm]
  oval 1.25x0.4 smd: 1(-5.775,10.4) 2(-5.775,9.75) 3(-5.775,9.1) 4(-5.775,8.45) 5(-5.775,7.8) 6(-5.775,7.15) 7(-5.775,6.5) 8(-5.775,5.85) 9(-5.775,5.2) 10(-5.775,4.55) 11(-5.775,3.9) 12(-5.775,3.25) 13(-5.775,2.6) 14(-5.775,1.95) 15(-5.775,1.3) 16(-5.775,0.65) 17(-5.775,0) 18(-5.775,-0.65) 19(-5.775,-1.3) 20(-5.775,-1.95) 21(-5.775,-2.6) 22(-5.775,-3.25) 23(-5.775,-3.9) 24(-5.775,-4.55) 25(-5.775,-5.2) 26(-5.775,-5.85) 27(-5.775,-6.5) 28(-5.775,-7.15) 29(-5.775,-7.8) 30(-5.775,-8.45) 31(-5.775,-9.1) 32(-5.775,-9.75) 33(-5.775,-10.4) 34(5.775,-10.4) 35(5.775,-9.75) 36(5.775,-9.1) 37(5.775,-8.45) 38(5.775,-7.8) 39(5.775,-7.15) 40(5.775,-6.5) 41(5.775,-5.85) 42(5.775,-5.2) 43(5.775,-4.55) 44(5.775,-3.9) 45(5.775,-3.25) 46(5.775,-2.6) 47(5.775,-1.95) 48(5.775,-1.3) 49(5.775,-0.65) 50(5.775,0) 51(5.775,0.65) 52(5.775,1.3) 53(5.775,1.95) 54(5.775,2.6) 55(5.775,3.25) 56(5.775,3.9) 57(5.775,4.55) 58(5.775,5.2) 59(5.775,5.85) 60(5.775,6.5) 61(5.775,7.15) 62(5.775,7.8) 63(5.775,8.45) 64(5.775,9.1) 65(5.775,9.75) 66(5.775,10.4)
  silkscreen extent -5.84,-11.15 4.75,11.17

## Part data
C5 C6 C11 C13 C14 C15 C17 C18 C24 C25 C26 C27 C28 C30 C31 C32 C33 C35 C37 C38 C40 C41 C42 C43 C45 C46 C47 C49 C50 C53 C54 C55 C56 C57 C58 C59 C61 C63 C64 C65 C67 C70 C71 C72 C73 C74 C75 C76 C78 C83 C84 C85 C86 C87 C88 C89 C90 C91 C92 C94 C95 C101 C105 C107 C116 C117 C251 C270 C271 C272 C273 C343 C1328 C1340 C1341: "Capacitor"
C29 C34 C60 C98 C99 C100 C102 C104 C275 C276 C1327 C1333 C1334 CE1 CE2 CE5: library part Cap2, "Capacitor"
J8 J11: library part "Header 4", "Header, 4-Pin"
J9 U208: library part "Header 3", "Header, 3-Pin"
J10: library part "Header 9", "Header, 9-Pin"
M1 M2 M3: library part 1PIN
Q24: "PNP Bipolar Transistor"
Q26: "NPN Bipolar Transistor"
R24 R25 R27 R28 R29 R35 R37 R47 R48 R54 R55 R56 R57 R59 R60 R62 R63 R64 R65 R66 R67 R68 R69 R70 R71 R72 R73 R74 R75 R76 R77 R78 R79 R80 R81 R82 R83 R85 R86 R90 R91 R95 R96 R98 R99 R100 R103 R105 R106 R109 R111 R112 R114 R117 R128 R129 R130 R131 R132 R133 R134 R139 R142 R158 R161 R180 R181 R182 R183 R184 R189 R190: "Resistor"
U1: library part LQFP128
U6 U7 U10 U206: library part "Header 5", "Header, 5-Pin"
U43: library part "Op Amp"
U202: library part "Header 8X2A", "Header, 8-Pin, Dual row"
Y1: "Crystal Oscillator"

## Free pads (board coordinates)
  rect 1x1 on Top Solder: 2(13.081,70.358)
  round 0.5 smd: TP1(34.061,60.02) TP1(40.386,57.81) TP3(82.819,79.72)

## Via types
v1: diameter 0.635, hole 0.305, Top Layer to Bottom Layer, 379 vias

## Nets (pads, with @x,y where several pads share a name; then routed paths per layer and width w, separated by ;. In a path a pad name is that pad's centre, name@x,y a point inside that pad or via, vN(x,y) a via of type N, cw(c..) or ccw(c..) an arc to the next point about the centre after c; other vN are vias at no path point)
1P2AO: C273.2 R82.2 U1.77 | length 8.8
  Top Layer w0.152: U1.77@89.751,58.78 89.751,63.97 90.297,64.516 C273.2@90.297,65.4 R82.2@92.202,65.4
5V: C65.1 C72.1 C99.1 C100.1 C102.1 C107.2 C343.1 D10.2 D12.2 D13.2 D14.2 FB3.1 J8.1 J9.1 J11.2 J11.3 L10.1 pad.TP3 R103.1 R128.1 R180.2 U6.3 U7.3 U10.3 | length 334
  Top Layer w0.2: L10.1@82.206,79.113 pad.TP3@82.829,79.71
  Top Layer w0.508: J9.1@6.39,72.994 10.445,72.994 13.081,70.358 13.081,69.596 11.151,67.666 C72.1@11.151,64.364 11.151,63.362 10.781,62.992 U10.3@10.781,61.343 ; D14.2@22.09,62.992 23.519,62.992 ; v1(23.519,62.467) 23.519,62.992 ; v1(23.519,63.517) 23.519,62.992 ; v1(36.305,66.421) 36.83,66.421 ; R128.1@36.83,64.261 36.83,66.421 ; v1(37.355,66.421) 36.83,66.421 ; C99.1@46.496,7.874 U7.3@46.496,15.365 ; v1(48.411,68.327) 48.936,68.327 ; D13.2@48.936,66.167 48.936,68.327 ; v1(49.461,68.327) 48.936,68.327 ; v1(50.742,62.611) 51.267,62.611 ; J8.1@50.8,41.275 C107.2@57.272,41.275 ; D12.2@51.267,64.135 51.267,62.611 ; v1(51.792,62.611) 51.267,62.611 ; v1(55.88,33.909) 56.134,33.655 R180.2@57.272,33.655 ; v1(55.88,40.005) 56.261,40.386 57.272,40.386 R103.1@57.272,39.37 ; 57.272,40.45 C107.2@57.272,41.275 ; v1(57.277,42.672) 57.277,41.28 C107.2@57.272,41.275 ; C107.2@57.34,41.275 C107.2@57.272,41.275 ; C100.1@60.212,7.495 U6.3@60.212,15.619 ; v1(62.34,66.675) v1(63.39,66.675) 63.881,66.675 64.389,66.167 D10.2@65.362,66.167 ; v1(80.518,76.708) v1(80.518,77.724) 80.518,78.613 81.056,79.151 82.012,79.151 L10.1@82.169,78.994
  Top Layer w1.016: FB3.1@29.596,4.826 v1(29.596,7.62) v1(29.596,8.636)
  Bottom Layer w0.508: J11.2@7.747,24.765 14.057,24.765 ; J11.3@7.747,27.265 14.057,27.265 14.097,27.305 ; v1(23.519,62.467) v1(23.519,63.517) 23.519,64.897 ; v1(36.305,66.421) v1(37.355,66.421) ; 36.83,64.897 36.83,66.421 ; 46.482,11.809 46.483,11.43 C99.1@46.496,7.874 ; v1(48.411,68.327) 48.936,68.327 ; 49.149,64.897 48.936,65.11 48.936,68.327 ; v1(49.461,68.327) 48.936,68.327 ; v1(50.742,62.611) 51.267,62.611 ; 51.267,64.897 51.267,62.611 ; v1(51.792,62.611) 51.267,62.611 ; v1(55.88,33.909) v1(55.88,40.005) ; 56.261,64.897 56.261,50.165 55.245,49.149 55.245,44.704 v1(57.277,42.672) ; 60.198,11.43 C100.1@60.212,7.495 ; v1(62.34,66.675) 62.865,66.675 ; v1(63.39,66.675) 62.865,66.675 ; 63.627,64.897 62.865,65.659 62.865,66.675
  Bottom Layer w1.016: v1(29.596,7.62) v1(29.596,8.636) 29.596,11.43
  Bottom Layer w2.032: 60.198,11.43 46.483,11.43 29.596,11.43 20.955,11.43 14.097,18.288 14.097,27.305 14.097,32.512 10.287,36.322 10.287,69.107 6.4,72.994 16.414,72.994 18.542,70.866 18.542,67.183 20.828,64.897 23.519,64.897 36.83,64.897 49.149,64.897 51.267,64.897 56.261,64.897 63.627,64.897 65.659,66.929 65.659,72.136 70.739,77.216 80.518,77.216
5VA: C60.1 C63.2 pad.TP1@34.061,60.02 R128.2 U43.8 | length 13.2
  Top Layer w0.2: 33.241,60.729 pad.TP1@34.003,59.967
  Top Layer w0.508: U43.8@35.258,55.753 35.258,56.896 34.496,57.658 C63.2@33.149,57.658 33.147,57.658 C60.1@33.147,62.561 R128.2@36.83,62.561
-10V: C29.2 C71.1 C74.1 D9.1 R47.2 U43.4 | length 32.2
  Top Layer w0.508: D9.1@21.751,25.214 C71.1@21.751,27.686 C74.1@21.751,29.972 21.751,31.022 27.94,37.211 27.94,37.465 C29.2@27.94,39.751 ; 27.94,36.83 28.067,36.703 29.947,36.703 ; v1(30.058,49.822) U43.4@30.058,51.943
  Bottom Layer w0.508: C29.2@27.94,39.751 30.058,41.869 v1(30.058,49.822)
/SYS_RST: C64.2 R63.2 U1.100 | length 24.4
  Top Layer w0.152: C64.2@75.182,73.152 75.182,72.515 74.295,71.628 74.295,58.293 74.676,57.912 77.597,57.912 79.454,56.055 U1.100@80.626,56.055
  Top Layer w0.508: C64.2@75.182,73.152 R63.2@75.182,75.057
A3V3: C5.2 C54.2 C57.2 C58.2 C61.2 C1334.1 L17.2 R81.1 U1.1 U1.97 U1.102 U1.107 U1.108 U1.113 U1.114 | length 88.9
  Top Layer w0.152: v1(78.232,55.88) 78.857,55.255 U1.102@80.626,55.255 ; 79.732,60.301 79.732,59.156 79.121,58.546 79.121,57.785 79.651,57.255 U1.97@80.626,57.255 ; 80.137,42.291 80.518,41.91 81.661,41.91 82.151,42.4 U1.1@82.151,43.33 ; U1.114@80.626,50.455 79.665,50.455 78.613,49.403 v1(77.978,49.403) 78.232,49.657 78.359,49.657 79.557,50.855 U1.113@80.626,50.855 ; U1.108@80.626,52.855 79.525,52.855 78.359,51.689 v1(77.978,51.689) 79.544,53.255 U1.107@80.626,53.255
  Top Layer w0.508: R81.1@76.518,39.942 78.74,39.942 78.74,40.894 80.137,42.291 v1(80.772,42.926) ; C58.2@76.658,57.138 C58.2@76.726,57.138 ; C54.2@76.713,49.403 v1(77.978,49.403) ; C57.2@76.713,51.308 77.597,51.308 v1(77.978,51.689) ; C58.2@76.713,57.023 77.47,57.023 77.851,56.642 77.851,56.261 v1(78.232,55.88) ; C61.2@76.713,60.833 77.851,60.833 78.383,60.301 79.018,60.301 79.732,60.301 80.645,61.214 ; L17.2@80.264,72.39 80.264,61.595 80.645,61.214 ; v1(81.153,59.563) v1(81.153,60.706) 80.645,61.214
  Bottom Layer w0.508: v1(77.978,49.403) 83.566,49.403 ; v1(77.978,51.689) 79.248,52.959 83.566,52.959 ; v1(78.232,55.88) 83.566,55.88 ; v1(80.772,42.926) 80.772,43.561 83.566,46.355 83.566,49.403 ; v1(81.153,60.706) v1(81.153,59.563) 83.566,57.15 83.566,55.88 ; 83.566,49.403 83.566,52.959 ; 83.566,52.959 83.566,55.88
A3V3_AUDIO: C70.2 CE5.1 R81.2 U1.121 | length 21.6
  Top Layer w0.152: v1(77.622,46.634) 78.638,46.634 79.659,47.655 U1.121@80.626,47.655
  Top Layer w0.508: R81.2@75.121,39.941 73.85,39.941 72.771,38.862 CE5.1@71.755,38.862 71.755,40.513 73.279,42.037 v1(78.105,42.037) ; C70.2@76.713,46.609 76.738,46.634 v1(77.622,46.634)
  Bottom Layer w0.508: v1(77.622,46.634) 78.105,46.152 v1(78.105,42.037)
A_L: R189.1 U1.118 | length 40.3
  Top Layer w0.152: 68.605,45.745 69.85,46.99 72.898,46.99 73.66,47.752 78.613,47.752 79.716,48.855 U1.118@80.626,48.855
  Top Layer w0.508: R189.1@43.752,49.022 R189.1@43.84,49.022 45.974,49.022 46.863,49.911 58.166,49.911 62.332,45.745 68.605,45.745
A_R: R190.2 U1.120 | length 60
  Top Layer w0.152: 59.728,45.388 69.008,45.394 70.223,46.609 73.025,46.609 73.787,47.371 78.867,47.371 79.551,48.055 U1.120@80.626,48.055
  Top Layer w0.508: R190.2@27.086,46.863 27.086,45.939 28.956,44.069 45.085,44.069 50.216,49.2 56.083,49.2 59.728,45.555
AUL: J10.5 R111.1 R132.2 R181.2 | length 14.2
  Top Layer w0.508: R111.1@40.689,61.214 R181.2@40.689,63.119 R132.2@40.689,65.151 40.689,68.375 44.258,71.944 J10.5@46.25,71.944
AUR: J10.2 R112.1 R134.2 R182.2 | length 14.4
  Top Layer w0.508: R112.1@25.449,61.214 R182.2@25.449,63.119 R134.2@25.449,65.151 25.449,66.597 30.796,71.944 J10.2@32.25,71.944
CVBS: C25.1 D10.3 J10.8 L1.2 R130.2 | length 14.4
  Top Layer w0.508: J10.8@60.25,71.944 61.136,71.058 R130.2@61.136,65.151 D10.3@63.162,65.151 C25.1@63.162,62.23 L1.2@63.162,59.944
D1V2: C38.2 C41.2 C42.2 C43.2 C55.2 C78.1 C272.2 C275.1 L38.2 R82.1 R114.1 U1.15 U1.46 U1.64 U1.83 U1.127 | length 162
  Top Layer w0.152: v1(78.994,43.688) 78.994,44.577 79.672,45.255 U1.127@80.626,45.255 ; U1.83@87.351,58.78 87.351,59.919 87.503,60.071 v1(87.503,60.452) ; v1(87.63,41.275) 87.63,41.783 87.751,41.904 U1.15@87.751,43.33 ; U1.46@96.076,50.055 97.9,50.055 97.917,50.038 v1(98.472,50.038) ; U1.64@96.076,57.255 97.133,57.255 97.282,57.404 97.282,57.912 v1(96.901,58.293)
  Top Layer w0.508: L38.2@25.781,23.074 25.781,27.051 26.543,27.813 C275.1@31.75,27.813 ; R114.1@30.861,24.795 31.75,24.795 ; C272.2@32.671,24.795 31.75,24.795 ; v1(63.5,29.464) 62.611,29.464 60.452,31.623 39.497,31.623 35.687,27.813 C275.1@31.75,27.813 ; C41.2@76.644,43.688 C41.2@76.713,43.688 v1(78.994,43.688) ; C38.2@87.122,40.01 87.122,40.64 87.63,41.148 v1(87.63,41.275) ; C55.2@87.249,61.717 87.249,60.706 v1(87.503,60.452) ; R82.1@92.202,66.612 R82.1@92.202,66.7 v1(92.202,67.945) ; v1(96.901,58.293) 98.679,60.071 ; v1(98.472,50.038) C42.2@100.027,50.038 ; v1(98.679,61.468) 98.679,60.071 ; C43.2@99.944,60.071 98.679,60.071 ; 31.75,24.795 C275.1@31.75,27.813
  Top Layer w1.016: v1(63.5,29.464) v1(64.516,29.464)
  Bottom Layer w0.508: 64.897,29.464 75.184,29.464 80.645,34.925 80.645,41.021 ; v1(78.994,43.688) 78.994,42.672 80.645,41.021 ; v1(87.503,60.452) 87.503,57.531 89.154,55.88 92.075,55.88 93.345,54.61 ; v1(87.63,41.275) 87.63,45.974 ; v1(92.202,67.945) 95.504,67.945 98.679,64.77 v1(98.679,61.468) ; v1(96.901,58.293) 93.345,54.737 93.345,54.61 ; v1(98.472,50.038) 93.345,50.038 ; 80.645,41.021 85.598,45.974 87.63,45.974 ; 87.63,45.974 91.821,45.974 93.345,47.498 93.345,50.038 ; 93.345,50.038 93.345,54.61
  Bottom Layer w1.016: v1(63.5,29.464) v1(64.516,29.464)